# EAGLE board cs_v1 (EAGLE 9.5.2), part 1 of 2
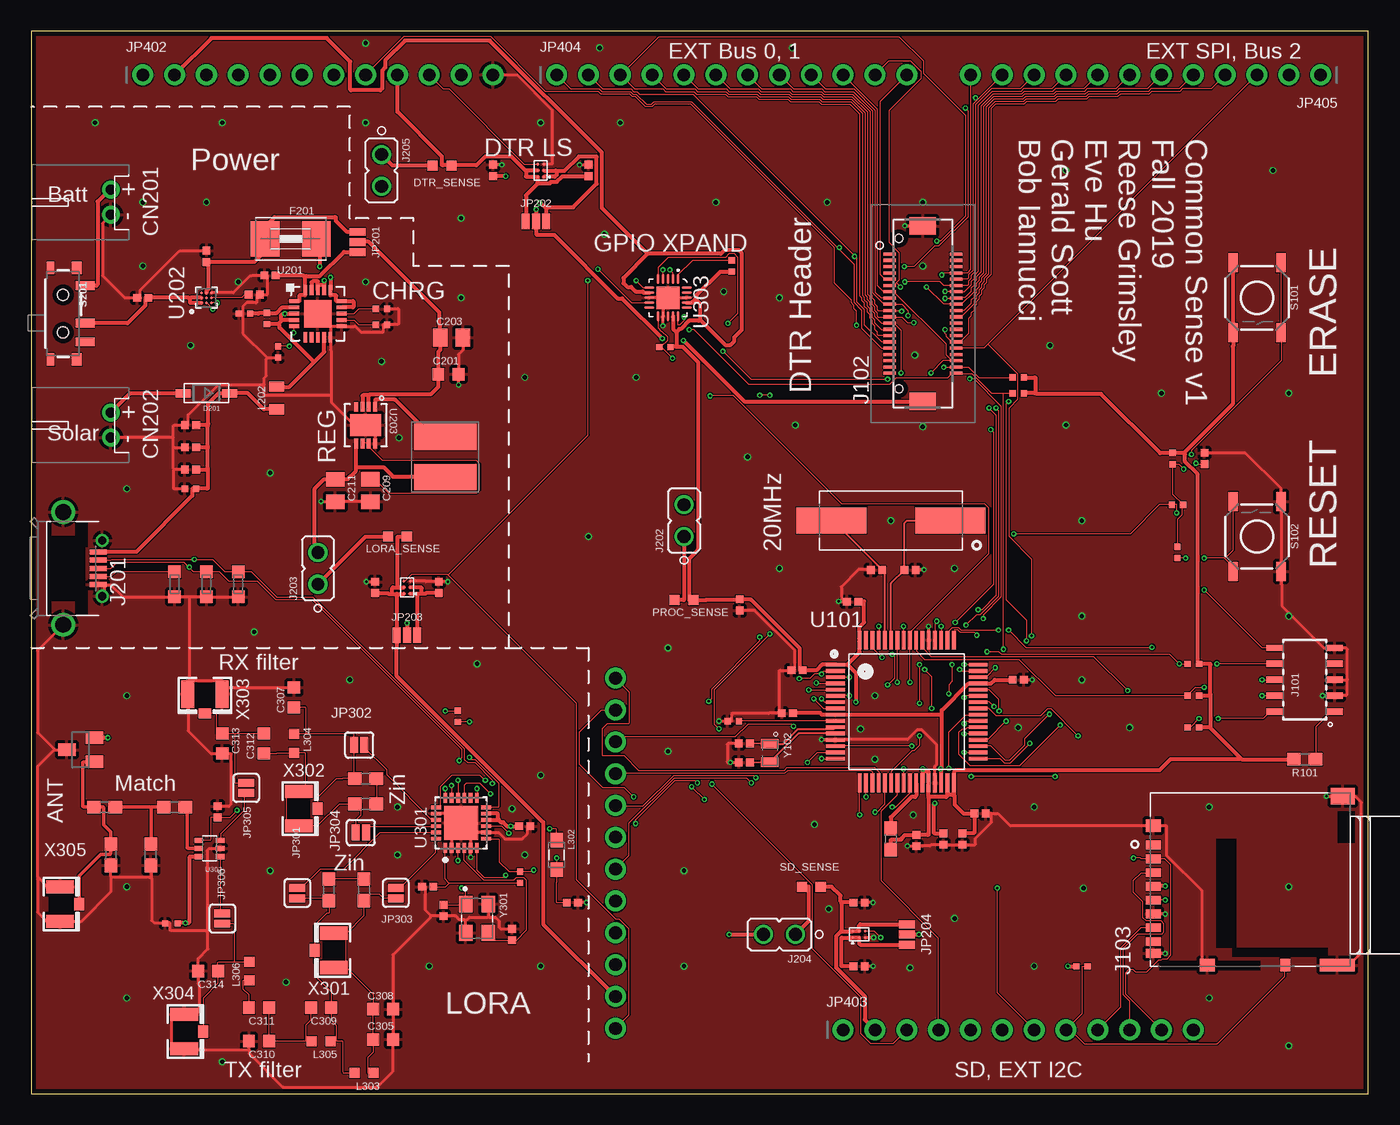
[diagram p0: board, top side]
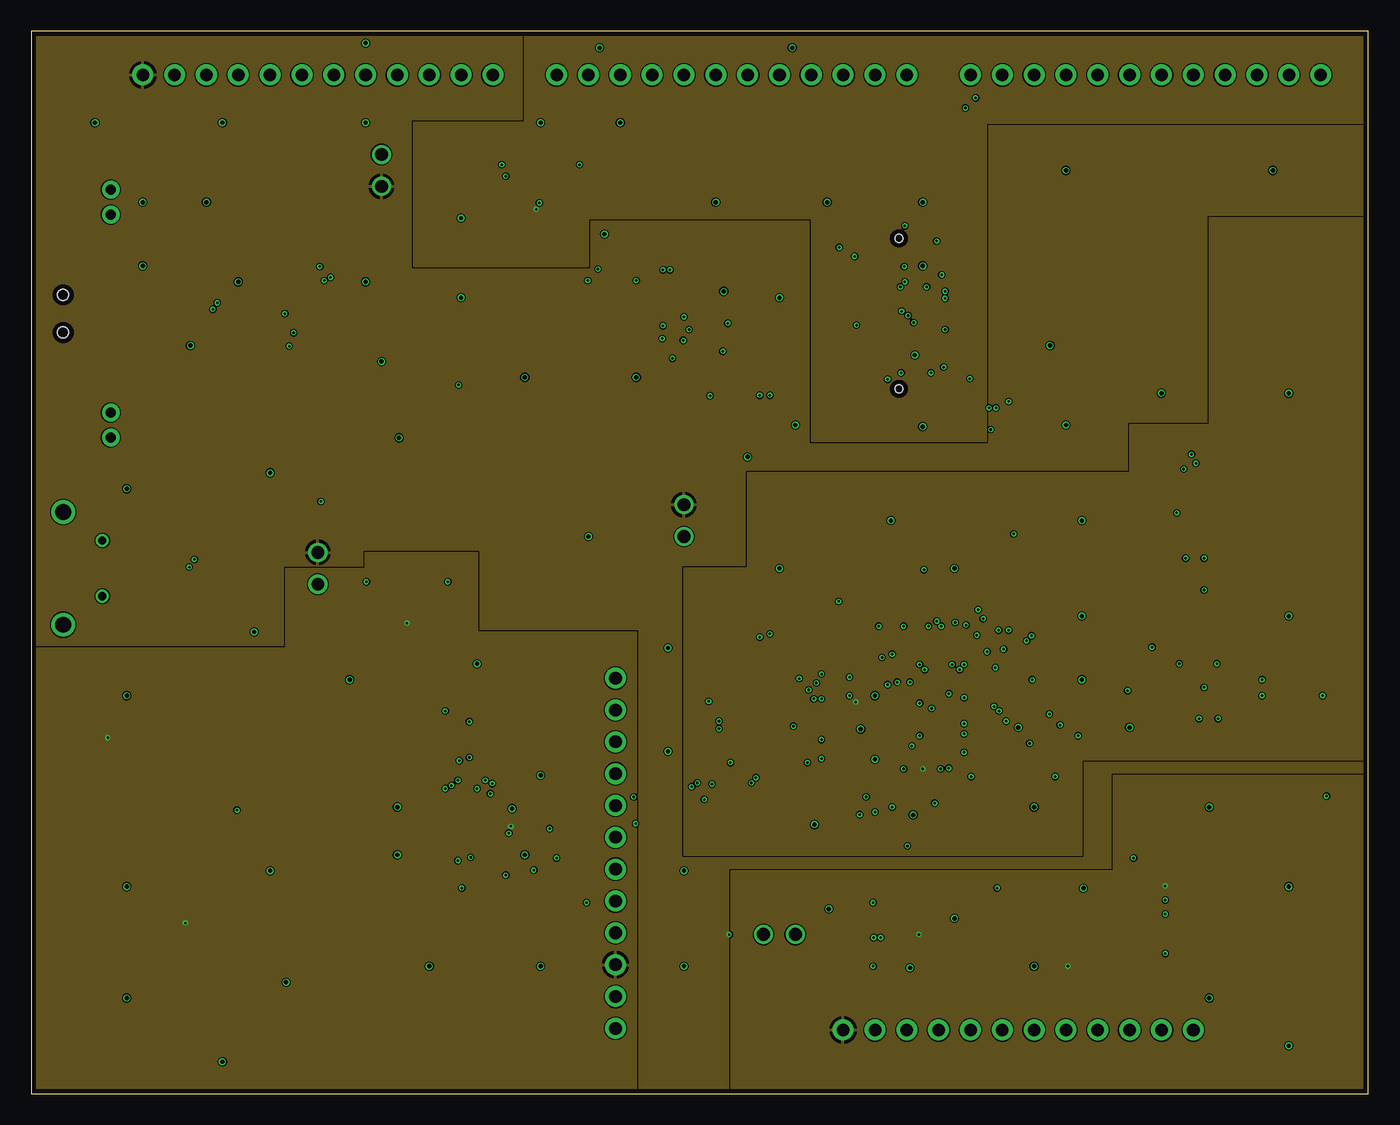
[diagram p1: board, inner layer Route2]
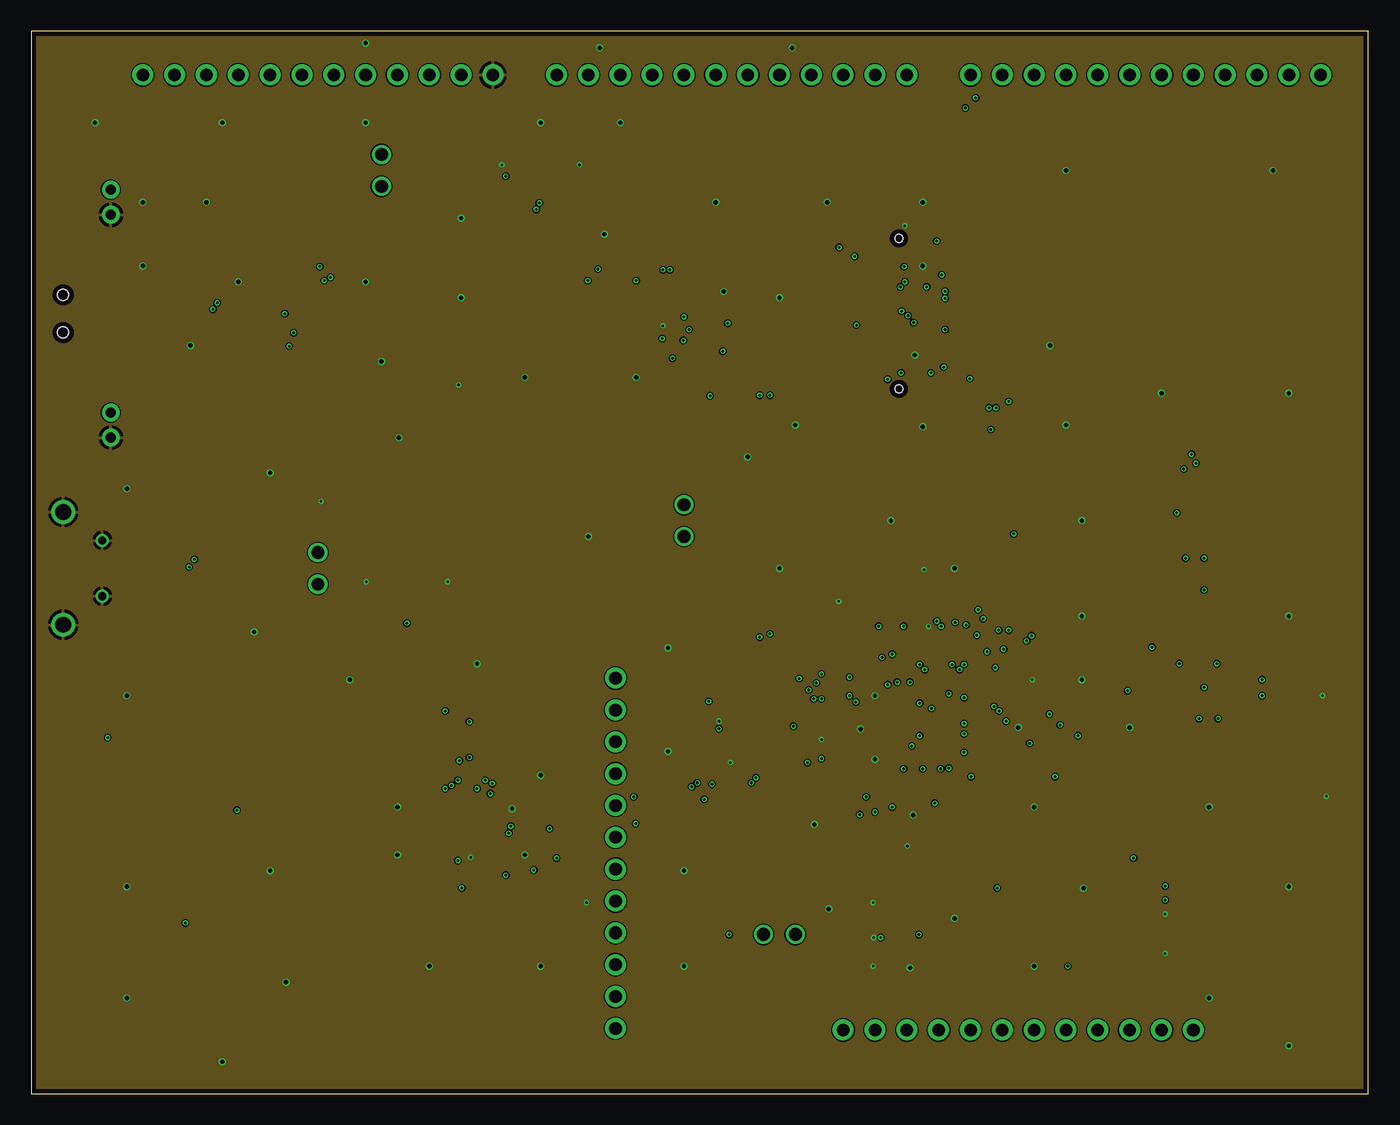
[diagram p2: board, inner layer Route15]
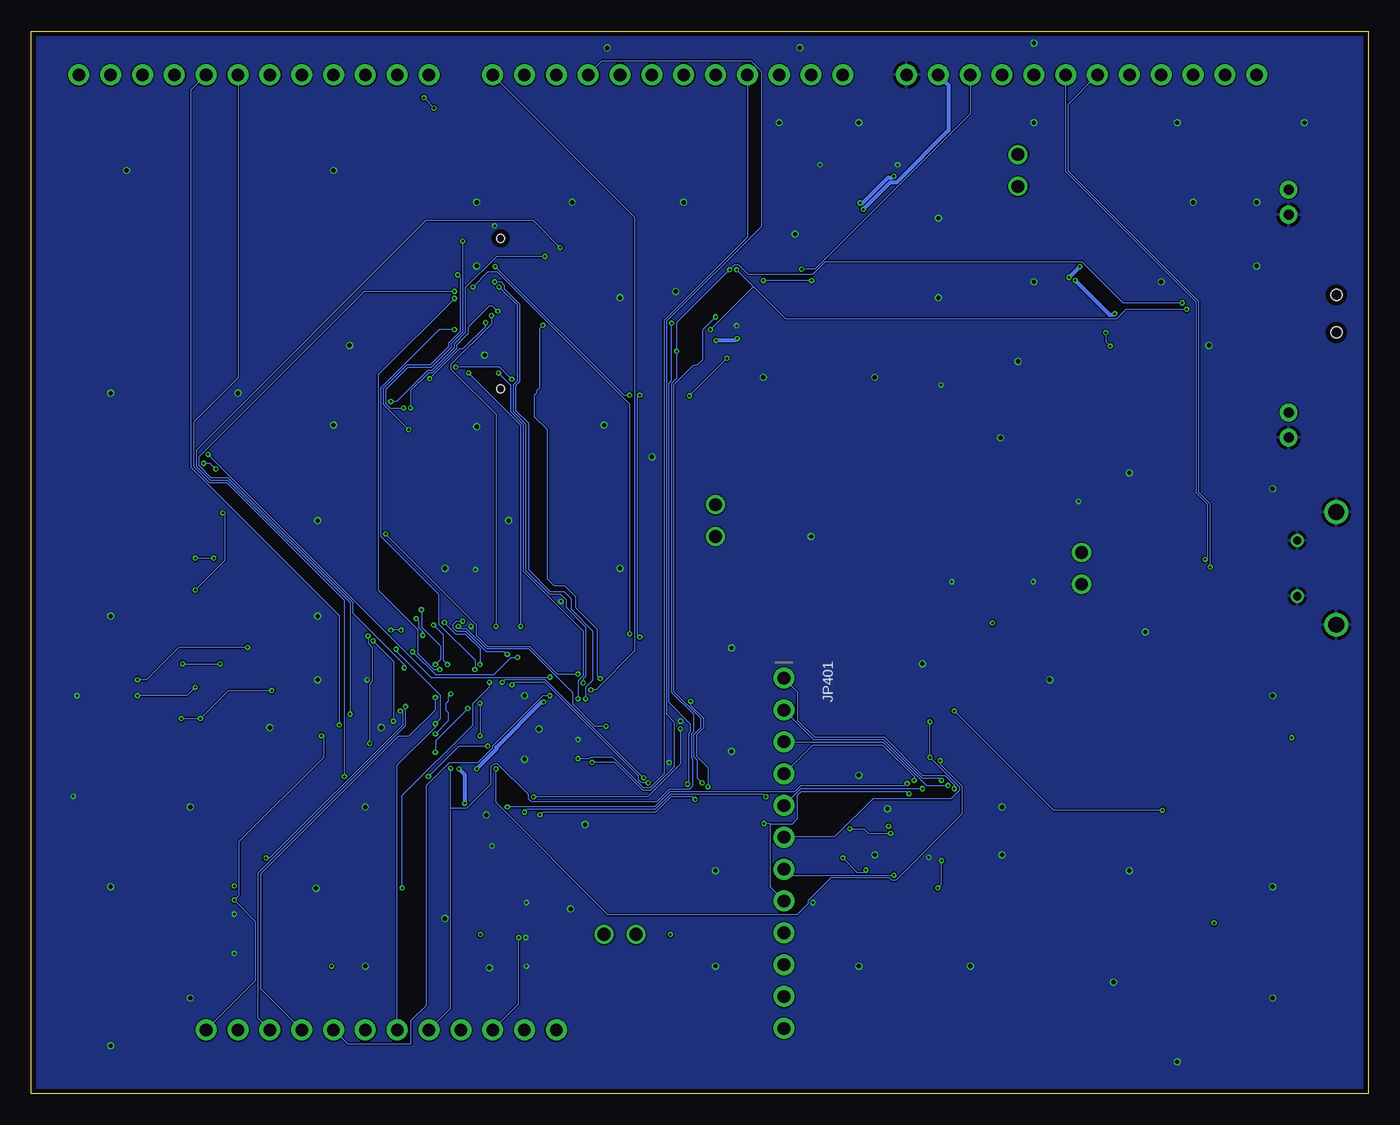
[diagram p3: board, bottom side, seen from below]

Size 106.66 x 84.76 mm. Coordinates in mm from the lower left corner, seen from the top.
Outline: 0,0 106.66,0 106.66,84.76 0,84.76 0,0
Copper layers (1*2*15*16): Top 0.035559375mm / dielectric 0.17018125mm / Route2 0.01778125mm / dielectric 47mil / Route15 0.01778125mm / dielectric 0.17018125mm / Bottom 0.035559375mm
Design rules "JLC": minimum track width 3.5mil, minimum drill 8mil, track to track 3.5mil, track to pad 3.5mil, pad to pad 3.5mil, via to via 5mil, smd to smd 3.5mil, copper to edge 15mil, drill to drill 6mil, minimum pad ring 4mil, minimum via ring 4mil, stop-mask expansion 2.5mil, vias tented up to drill 0mil, thermal gap 10mil
Net classes: 1 power_3v3: width 0.305 mm; 2 power_5: width 0.305 mm; 3 50_ohm: width 0.279 mm; 4 power_bat: width 0.305 mm; 5 10_mil: width 0.254 mm

## Footprints (pad centres in the part's own frame; a part is rotated, then mirrored left to right if it is on the bottom)
C0402 = smd 0.62 x 0.62: 1 -0.45,0; 2 0.45,0
C0603 = smd 0.95 x 1: 1 -0.8,0; 2 0.8,0
C0805 = smd 1.15 x 1.45: 1 -0.9,0; 2 0.9,0
C0402' = smd 0.5 x 0.5: 1 -0.5,0; 2 0.5,0
JST-PH-2-THM-RA = drill 0.8 pad 1.422: 1 1,0; 2 -1,0
SOD-123 = smd 1.2 x 0.7: A 1.85,0; C -1.85,0
1812 = smd 2.286 x 2.794: 1 -2.046,0; 2 2.046,0
SAMTECH_FTSH-105-01 = smd 0.508 x 1.27: 1 -2.54,-2.413; 2 -2.54,2.413; 3 -1.27,-2.413; 4 -1.27,2.413; 5 0,-2.413; 6 0,2.413; 7 1.27,-2.413; 8 1.27,2.413; 9 2.54,-2.413; 10 2.54,2.413
DF174040DS05V57_1 = smd 0.25 x 1: 1 -4.75,-2.65; 2 -4.75,2.65; 3 -4.25,-2.65; 4 -4.25,2.65; 5 -3.75,-2.65; 6 -3.75,2.65; 7 -3.25,-2.65; 8 -3.25,2.65; 9 -2.75,-2.65; 10 -2.75,2.65; 11 -2.25,-2.65; 12 -2.25,2.65; 13 -1.75,-2.65; 14 -1.75,2.65; 15 -1.25,-2.65; 16 -1.25,2.65; 17 -0.75,-2.65; 18 -0.75,2.65; 19 -0.25,-2.65; 20 -0.25,2.65; 21 0.25,-2.65; 22 0.25,2.65; 23 0.75,-2.65; 24 0.75,2.65; 25 1.25,-2.65; 26 1.25,2.65; 27 1.75,-2.65; 28 1.75,2.65; 29 2.25,-2.65; 30 2.25,2.65; 31 2.75,-2.65; 32 2.75,2.65; 33 3.25,-2.65; 34 3.25,2.65; 35 3.75,-2.65; 36 3.75,2.65; 37 4.25,-2.65; 38 4.25,2.65; 39 4.75,-2.65; 40 4.75,2.65 | smd 1.4 x 2.1: 41 -7,0; 42 7,0 | hole 0.65: -6,-1.9; 6,-1.9
HRS_DM3AT-SF-PEJM5 = smd 0.7 x 1.2: 1 3.2,0; 2 2.1,0; 3 1,0; 4 -0.1,0; 5 -1.2,0; 6 -2.3,0; 7 -3.4,0; 8 -4.5,0; SWB -5.45,0 | smd 1 x 1.2: P1 -6.4,-4.3; P4 4.75,0 | smd 1 x 2.8: P2 -6.4,-14.65 | smd 1.3 x 1.9: P3 7.1,-15.1 | smd 1 x 0.8: SWA -6.4,-10.5
ZX62D-AB-5P8 = smd 1.35 x 0.4: D+ 2.8,0; D- 2.8,0.65; GND 2.8,-1.3; USBID 2.8,-0.65; VBUS 2.8,1.3 | drill 1.25 pad 1.9: S1 0,-4.5; S2 0,4.5 | drill 0.65 pad 1.05: S3 3.125,2.225; S4 3.125,-2.225
HEADER-1X2 = drill 1.016: 1 0,-1.27; 2 0,1.27
SMT-JUMPER_3_NO_NO-SILK = smd 0.635 x 1.27: 1 -0.813,0; 2 0,0; 3 0.813,0
SMT-JUMPER_2_NO_SILK = smd 0.635 x 1.27: 1 -0.406,0; 2 0.406,0
1X12_ROUND = drill 1 pad 1.676: 1 -13.97,0; 2 -11.43,0; 3 -8.89,0; 4 -6.35,0; 5 -3.81,0; 6 -1.27,0; 7 1.27,0; 8 3.81,0; 9 6.35,0; 10 8.89,0; 11 11.43,0; 12 13.97,0
L-5X5SMD = smd 2.1 x 5: 1 -1.6,0; 2 1.6,0
0805 = smd 0.8 x 1.2: 1 -0.9,0; 2 0.9,0
L0402 = smd 0.5 x 0.5: 1 -0.45,0; 2 0.45,0
INDC2012X87N = smd 1.15 x 1: 1 -1.175,0; 2 1.175,0
L0603 = smd 0.8 x 0.8: 1 -0.75,0; 2 0.75,0
0603 = smd 1.1 x 1: 1 -0.85,0; 2 0.85,0
R0402 = smd 0.5 x 0.5: 1 -0.45,0; 2 0.45,0
CT/CN0603 = smd 1 x 1: 1 -1,0; 2 1,0
R0603 = smd 0.8 x 0.8: 1 -0.75,0; 2 0.75,0
TACTILE_SWITCH_SMD_5.2MM = smd 1.524 x 0.762: 1 -2.794,1.905; 2 2.794,1.905; 3 -2.794,-1.905; 4 2.794,-1.905
SWITCH_SPST_SMD_A = smd 0.7 x 1.5: 1 -2.25,-1.75; 2 -0.75,-1.75; 3 2.25,-1.75 | smd 1 x 0.6: GND1 -3.65,1; GND3 3.65,1 | smd 1 x 0.8: GND2 -3.65,-1.1; GND4 3.65,-1.1 | hole 0.9: -1.5,0; 1.5,0
QFP50P1200X1200X160-64N = smd 1.5 x 0.3: 1 -5.7,3.75; 2 -5.7,3.25; 3 -5.7,2.75; 4 -5.7,2.25; 5 -5.7,1.75; 6 -5.7,1.25; 7 -5.7,0.75; 8 -5.7,0.25; 9 -5.7,-0.25; 10 -5.7,-0.75; 11 -5.7,-1.25; 12 -5.7,-1.75; 13 -5.7,-2.25; 14 -5.7,-2.75; 15 -5.7,-3.25; 16 -5.7,-3.75; 33 5.7,-3.75; 34 5.7,-3.25; 35 5.7,-2.75; 36 5.7,-2.25; 37 5.7,-1.75; 38 5.7,-1.25; 39 5.7,-0.75; 40 5.7,-0.25; 41 5.7,0.25; 42 5.7,0.75; 43 5.7,1.25; 44 5.7,1.75; 45 5.7,2.25; 46 5.7,2.75; 47 5.7,3.25; 48 5.7,3.75 | smd 0.3 x 1.5: 17 -3.75,-5.7; 18 -3.25,-5.7; 19 -2.75,-5.7; 20 -2.25,-5.7; 21 -1.75,-5.7; 22 -1.25,-5.7; 23 -0.75,-5.7; 24 -0.25,-5.7; 25 0.25,-5.7; 26 0.75,-5.7; 27 1.25,-5.7; 28 1.75,-5.7; 29 2.25,-5.7; 30 2.75,-5.7; 31 3.25,-5.7; 32 3.75,-5.7; 49 3.75,5.7; 50 3.25,5.7; 51 2.75,5.7; 52 2.25,5.7; 53 1.75,5.7; 54 1.25,5.7; 55 0.75,5.7; 56 0.25,5.7; 57 -0.25,5.7; 58 -0.75,5.7; 59 -1.25,5.7; 60 -1.75,5.7; 61 -2.25,5.7; 62 -2.75,5.7; 63 -3.25,5.7; 64 -3.75,5.7
QFN20_4X4MC = smd 0.813 x 0.305: 1 -1.892,1; 2 -1.892,0.5; 3 -1.892,0; 4 -1.892,-0.5; 5 -1.892,-1; 11 1.892,-1; 12 1.892,-0.5; 13 1.892,0; 14 1.892,0.5; 15 1.892,1 | smd 0.305 x 0.813: 6 -1,-1.892; 7 -0.5,-1.892; 8 0,-1.892; 9 0.5,-1.892; 10 1,-1.892; 16 1,1.892; 17 0.5,1.892; 18 0,1.892; 19 -0.5,1.892; 20 -1,1.892 | smd 2.2 x 2.2: 21 0,0
BGA9N40P3X3_144X146X69N = smd 0.24 x 0.24: A1 -0.4,0.4; A2 0,0.4; A3 0.4,0.4; B1 -0.4,0; B2 0,0; B3 0.4,0; C1 -0.4,-0.4; C2 0,-0.4; C3 0.4,-0.4
DFN-8_DD = smd 0.787 x 0.305: 1 -1.46,0.75; 2 -1.46,0.25; 3 -1.46,-0.25; 4 -1.46,-0.75; 5 1.46,-0.75; 6 1.46,-0.25; 7 1.46,0.25; 8 1.46,0.75 | smd 1.753 x 2.489: 9 0,0
WLCSP6_2X3 = smd 0.254 x 0.254: A1 -0.25,0.5; A2 0.25,0.5; B1 -0.25,0; B2 0.25,0; C1 -0.25,-0.5; C2 0.25,-0.5
SEMTECH_SX1261IMLTRT_0 = smd 0.8 x 0.3: 1 -2,1.25; 2 -2,0.75; 3 -2,0.25; 4 -2,-0.25; 5 -2,-0.75; 6 -2,-1.25; 13 2,-1.25; 14 2,-0.75; 15 2,-0.25; 16 2,0.25; 17 2,0.75; 18 2,1.25 | smd 0.3 x 0.8: 7 -1.25,-2; 8 -0.75,-2; 9 -0.25,-2; 10 0.25,-2; 11 0.75,-2; 12 1.25,-2; 19 1.25,2; 20 0.75,2; 21 0.25,2; 22 -0.25,2; 23 -0.75,2; 24 -1.25,2 | smd 2.7 x 2.7: 25 0,0
SC-70 = smd 0.4 x 0.7: 1 -0.65,-0.85; 2 0,-0.85; 3 0.65,-0.85; 4 0.65,0.85; 5 0,0.85; 6 -0.65,0.85
UQFN20 = smd 0.8 x 0.2: 1 -1.5,0.8; 2 -1.5,0.4; 3 -1.5,0; 4 -1.5,-0.4; 5 -1.5,-0.8; 11 1.5,-0.8; 12 1.5,-0.4; 13 1.5,0; 14 1.5,0.4; 15 1.5,0.8 | smd 0.2 x 0.8: 6 -0.8,-1.5; 7 -0.4,-1.5; 8 0,-1.5; 9 0.4,-1.5; 10 0.8,-1.5; 16 0.8,1.5; 17 0.4,1.5; 18 0,1.5; 19 -0.4,1.5; 20 -0.8,1.5 | smd 1.8 x 1.8: 21 0,0
SOT23-3 = smd 1 x 1.4: 1 -0.95,-1.1; 2 0.95,-1.1; 3 0,1.1
U.FL = smd 2.2 x 1.05: 1 0,1.375; 2 0,-1.375 | smd 0.8 x 1: 3 1.525,0
XTAL_ABLS2-20.000MHZ-D4Y-T = smd 5.6 x 2.1: 1 -4.75,0; 2 4.75,0
XTAL_ABS06-32.768KHZ-T = smd 0.75 x 1.4: 1 -0.73,0; 2 0.73,0
ECS-32MHZ_CKM-TR_XTAL = smd 1.3 x 1.1: 1 -1.15,-0.9; 2 1.15,-0.9; 3 1.15,0.9; 4 -1.15,0.9

## Placement (x,y rotation side)
C101  5p  [C0402]  70.1,41.78 0 top
C102  16pF  [C0402]  56.9,27.94 180 top
C103  5p  [C0402]  67.44,41.78 180 top
C104  16pF  [C0402]  56.9,26.42 180 top
C105  4.7u  [C0402]  56.52,38.99 270 top
C106  2.2u  [C0402]  60.33,30.35 180 top
C107  100n  [C0402]  72.77,20.32 270 top
C108  100n  [C0402]  78.74,33.02 0 top
C109  100n  [C0402]  61.09,33.78 180 top
C110  100n  [C0402]  70.61,20.19 270 top
C111  100n  [C0402]  75.69,22.35 0 top
C112  100n  [C0402]  65.53,39.24 180 top
C113  100n  [C0402]  74.3,20.32 270 top
C114  100n  [C0402]  93.6,50.67 90 top
C201  0.1uF  [C0603]  33.27,57.4 0 top
C202  100n  [C0402]  8.89,63.5 180 top
C203  10uF  [C0805]  33.53,60.33 0 top
C204  10n  [C0402]  12.7,49.78 180 top
C205  10u  [C0402]  12.7,53.34 180 top
C206  470n  [C0402]  17.78,63.75 0 top
C207  10u  [C0402]  12.7,51.56 180 top
C208  4.7u  [C0402]  19.05,65.28 180 top
C209  2.2uF  [C0805]  27.05,48.13 270 top
C210  4.7u  [C0402]  13.97,66.8 90 top
C211  22uF  [C0805]  24.26,48.13 270 top
C212  1u  [C0402]  27.43,40.39 90 top
C213  1u  [C0402]  66.04,15.24 0 top
C214  1u  [C0402]  44.45,73.66 90 top
C215  100n  [C0402]  36.83,73.66 90 top
C216  100n  [C0402]  32.51,40.39 90 top
C217  100n  [C0402]  66.04,10.16 0 top
C301  17p  [C0402]  32.89,14.61 270 top
C302  17p  [C0402]  38.35,12.7 90 top
C303  10n  [C0402]  31.62,16.51 0 top
C304  100n  [C0402]  39.37,21.34 0 top
C305  47n  [C0603]  28.07,4.32 0 top
C306  470n  [C0402]  43.18,15.24 0 top
C307  1.8p  [C0603]  20.95,31.62 90 top
C308  47p  [C0603]  28.07,6.73 0 top
C309  3.3p  [C0603]  23.11,6.86 180 top
C310  8.2p  [C0603]  18.16,4.19 180 top
C311  39p  [C0603]  18.16,6.86 180 top
C312  2.4p  [C0603]  18.54,27.94 90 top
C313  1.0p  [C0603]  15.24,27.94 270 top
C314  3.0p  [C0603]  14.1,9.78 180 top
C315  1n  [C0402]  14.86,22.48 90 top
C316  1n  [C0402']  11.18,13.59 180 top
CN201  Battery  [JST-PH-2-THM-RA]  6.35,71.12 90 top
CN202  Solar  [JST-PH-2-THM-RA]  6.35,53.34 90 top
D201  MBR120VLSFT3GOSCT-ND  [SOD-123]  13.97,55.88 180 top
F201  MF-MSMF050-2  [1812]  20.7,68.2 180 top
J101  CORTEX_DEBUG_SMD  [SAMTECH_FTSH-105-01]  101.6,33.02 90 top
J102  HIROSE-DF17(4.0)-40DS-0.5V(57)  [DF174040DS05V57_1]  71.12,62.23 270 top
J103  DM3AT-SF-PEJM5  [HRS_DM3AT-SF-PEJM5]  89.53,16.64 90 top
J201  USBABSMTDIP  [ZX62D-AB-5P8]  2.54,41.91 0 top
J202  J-JUMPER  [HEADER-1X2]  52.07,45.72 0 top
J203  J-JUMPER  [HEADER-1X2]  22.86,41.91 0 top
J204  JMP_SD  [HEADER-1X2]  59.69,12.7 90 top
J205  J-JUMPER  [HEADER-1X2]  27.94,73.66 180 top
JP201  JMP_CHRG  [SMT-JUMPER_3_NO_NO-SILK]  26.04,67.94 270 top
JP202  JMP_DTR  [SMT-JUMPER_3_NO_NO-SILK]  40.26,69.6 0 top
JP203  JMP_LORA  [SMT-JUMPER_3_NO_NO-SILK]  29.97,36.58 0 top
JP204  JMP_SD  [SMT-JUMPER_3_NO_NO-SILK]  69.85,12.7 270 top
JP301  JUMPER-SMT_2_NO_SILK  [SMT-JUMPER_2_NO_SILK]  21.21,16 270 top
JP302  JUMPER-SMT_2_NO_SILK  [SMT-JUMPER_2_NO_SILK]  26.16,27.81 0 top
JP303  JUMPER-SMT_2_NO_SILK  [SMT-JUMPER_2_NO_SILK]  29.08,16 90 top
JP304  JUMPER-SMT_2_NO_SILK  [SMT-JUMPER_2_NO_SILK]  26.29,20.83 0 top
JP305  JUMPER-SMT_2_NO_SILK  [SMT-JUMPER_2_NO_SILK]  17.14,24.38 90 top
JP306  JUMPER-SMT_2_NO_SILK  [SMT-JUMPER_2_NO_SILK]  15.24,13.97 270 top
JP401  [1X12_ROUND]  46.61,19.18 270 bottom
JP402  [1X12_ROUND]  22.86,81.28 0 top
JP403  [1X12_ROUND]  78.74,5.08 0 top
JP404  [1X12_ROUND]  55.88,81.28 0 top
JP405  [1X12_ROUND]  88.9,81.28 180 top
L201  10uH  [L-5X5SMD]  33.02,50.8 270 top
L202  3.3µH/±20%/450mA  [0805]  19.56,55.5 90 top
L301  47n  [L0402]  38.99,17.27 270 top
L302  15u  [INDC2012X87N]  41.91,19.05 270 top
L303  47n  [L0603]  26.54,1.65 180 top
L304  15n  [L0603]  20.95,27.94 270 top
L305  2.2n  [L0603]  23.11,4.19 180 top
L306  9.1n  [L0603]  17.4,9.78 90 top
R101  0  [0603]  101.6,26.67 180 top
R102  100k  [R0402]  92.71,29.21 0 top
R103  100k  [R0402]  92.71,31.75 0 top
R104  100k  [R0402]  56.01,29.72 0 top
R105  100k  [R0402]  92.71,34.29 0 top
R106  0  [0603]  68.58,20.32 270 top
R107  4.7K  [R0402]  78.74,55.88 0 top
R108  4.7K  [R0402]  78.74,57.15 0 top
R109  510k  [R0402]  83.82,10.16 180 top
R110  39  [R0402]  91.44,43.18 90 top
R111  100k  [R0402]  91.06,50.67 90 top
R112  39  [R0402]  91.44,46.99 180 top
R201  270k  [R0402]  18.8,61.85 270 top
R202  100k  [R0402]  17.02,62.23 0 top
R203  2k  [R0402]  27.94,62.61 180 top
R204  100k  [R0402]  27.94,61.34 180 top
R205  CG0603MLC-05E  [CT/CN0603]  11.43,40.64 270 top
R206  10k  [R0402]  19.68,59.18 90 top
R207  CG0603MLC-05E  [CT/CN0603]  13.97,40.64 270 top
R208  CG0603MLC-05E  [CT/CN0603]  16.51,40.64 270 top
R209  10k  [R0402]  12.7,48.26 0 top
R210  1.33  [R0603]  29.21,44.45 0 top
R211  1  [R0603]  52.07,39.37 0 top
R212  1  [R0603]  62.23,16.51 0 top
R213  0.5  [R0603]  32.77,74.04 0 top
R301  0  [0603]  23.75,16.26 90 top
R302  0  [0603]  26.54,16.26 270 top
R303  0  [0603]  26.67,23.11 0 top
R304  0  [0603]  26.67,25.15 180 top
R305  10k  [R0402]  55.88,66.04 270 top
R306  1k  [R0402]  34.04,30.1 90 top
R307  0  [0603]  11.43,22.86 180 top
R308  0  [0603]  9.53,19.05 90 top
R309  0  [0603]  5.84,22.86 180 top
R310  0  [0603]  6.35,19.05 90 top
R311  10k  [R0402]  50.55,59.56 0 top
S101  MOMENTARY-SWITCH-SPST-SMD-5.2-REDUNDANT  [TACTILE_SWITCH_SMD_5.2MM]  97.79,63.5 270 top
S102  MOMENTARY-SWITCH-SPST-SMD-5.2-REDUNDANT  [TACTILE_SWITCH_SMD_5.2MM]  97.79,44.45 90 top
S201  [SWITCH_SPST_SMD_A]  2.54,62.23 90 top
U101  ATSAMG55J19A-AU  [QFP50P1200X1200X160-64N]  69.85,30.48 0 top
U201  U-MCP73871-2CCI/ML  [QFN20_4X4MC]  22.86,62.23 0 top
U202  COULOMB-MAX17262  [BGA9N40P3X3_144X146X69N]  13.97,63.5 90 top
U203  BUCK-LTC3624EDD-3.3PBF  [DFN-8_DD]  26.67,53.34 270 top
U204  LOADSWITCH-MIC94162  [WLCSP6_2X3]  40.64,73.66 180 top
U205  LOADSWITCH-MIC94162  [WLCSP6_2X3]  29.97,40.39 180 top
U206  LOADSWITCH-MIC94162  [WLCSP6_2X3]  66.04,12.7 90 top
U301  SEMTECH_SX1261IMLTRTSEMTECH_SX1261IMLTRT_0_0  [SEMTECH_SX1261IMLTRT_0]  34.29,21.59 90 top
U302  PE4259  [SC-70]  14.22,19.56 90 top
U303  EXPANDER-SX1502  [UQFN20]  50.8,63.5 270 top
U304  CM1213A-01SO  [SOT23-3]  3.94,27.43 90 top
X301  u.Fl  [U.FL]  24.13,11.43 180 top
X302  u.Fl  [U.FL]  21.34,22.73 0 top
X303  u.Fl  [U.FL]  13.84,31.88 270 top
X304  u.Fl  [U.FL]  12.19,4.95 0 top
X305  u.Fl  [U.FL]  2.29,15.11 0 top
Y101  ABLS2-20.000MHZ-D4Y-T  [XTAL_ABLS2-20.000MHZ-D4Y-T]  68.58,45.72 180 top
Y102  ABS06-32.768KHZ-T  [XTAL_ABS06-32.768KHZ-T]  58.93,27.18 270 top
Y301  ECS-32MHZ_CKM_XTAL  [ECS-32MHZ_CKM-TR_XTAL]  35.56,13.97 270 top

## Library data of the parts
C101 C103 = Capacitors; MANUFACTURER: Kemet; MP: CC0402BRNPO9BN5R0; MPN: C0402; TC: X7R; TOL: 10%; VOLTAGE: 6.3V
C102 C104 = Capacitors; MANUFACTURER: Kemet; MP: CBR04C160F5GAC; MPN: C0402; TC: X7R; TOL: 10%; VOLTAGE: 6.3V
C105 C208 C210 = Capacitors; MANUFACTURER: Kemet; MP: CC0402KRX5R5BB475; MPN: C0402; TC: X7R; TOL: 10%; VOLTAGE: 6.3V
C106 = Capacitors; MANUFACTURER: Kemet; MP: GRM155R60J225KE95D; MPN: C0402; TC: X7R; TOL: 10%; VOLTAGE: 6.3V
C107-C114 C202 C215-C217 = Capacitors; MANUFACTURER: Kemet; MP: CC0402KRX5R5BB104; MPN: C0402; TC: X7R; TOL: 10%; VOLTAGE: 6.3V
C201 = Capacitors; MANUFACTURER: Kemet; MP: C0603C104K3RACTU; MPN: C0603; TC: X7R; TOL: 10%; VOLTAGE: 6.3V
C203 = Capacitors; MANUFACTURER: Kemet; MP: C0805C106K9RACTU; MPN: C0805; TC: X7R; TOL: 10%; VOLTAGE: 6.3V
C204 = Capacitors; MANUFACTURER: Kemet; MP: CC0100KRX5R5BB103; MPN: C0402; TC: X7R; TOL: 10%; VOLTAGE: 6.3V
C205 C207 = Capacitors; MANUFACTURER: Kemet; MP: CC0402MRX5R4BB106; MPN: C0402; TC: X7R; TOL: 10%; VOLTAGE: 6.3V
C206 = Capacitors; MANUFACTURER: Kemet; MP: CC0402KRX5R5BB474; MPN: C0402; TC: X7R; TOL: 10%; VOLTAGE: 6.3V
C209 = Capacitors; MANUFACTURER: Kemet; MP: C0805C225K8RACTU; MPN: C0805; TC: X7R; TOL: 10%; VOLTAGE: 6.3V
C211 = Capacitors; MANUFACTURER: Kemet; MP: C0805C226K9PAC7800; MPN: C0805; TC: X7R; TOL: 10%; VOLTAGE: 6.3V
C212-C214 = Capacitors; MANUFACTURER: Kemet; MP: CC0402KRX5R5BB105; MPN: C0402; TC: X7R; TOL: 10%; VOLTAGE: 6.3V
C301 C302 = Capacitors; MANUFACTURER: Kemet; MP: GCQ1555C1H170JB01D; MPN: C0402; TC: X7R; TOL: 5%; VOLTAGE: 6.3V
C303 = Capacitors; MANUFACTURER: Kemet; MP: GRM155R71E103KA01D; MPN: C0402; TC: X7R; TOL: 10%; VOLTAGE: 6.3V
C304 = Capacitors; MANUFACTURER: Kemet; MP: GRM155R71C104KA88D; MPN: C0402; TC: X7R; TOL: 10%; VOLTAGE: 6.3V
C305 = Capacitors; MANUFACTURER: Kemet; MP: CC0603KRX7R9BB473; MPN: C0603; TC: X7R; TOL: 10%; VOLTAGE: 6.3V
C306 = Capacitors; MANUFACTURER: Kemet; MP: GRM155R61A474KE15D; MPN: C0402; TC: X7R; TOL: 10%; VOLTAGE: 6.3V
C307 = Capacitors; MANUFACTURER: Kemet; MP: CC0603BRNPO9BN1R8; MPN: C0603; TC: X7R; TOL: 10%; VOLTAGE: 6.3V
C308 = Capacitors; MANUFACTURER: Kemet; MP: CC0603FRNPO0BN470; MPN: C0603; TC: X7R; TOL: 10%; VOLTAGE: 6.3V
C309 = Capacitors; MANUFACTURER: Kemet; MP: AC0603CRNPO9BN3R3; MPN: C0603; TC: X7R; TOL: 10%; VOLTAGE: 6.3V
C310 = Capacitors; MANUFACTURER: Kemet; MP: CC0603BRNPO9BN8R2; MPN: C0603; TC: X7R; TOL: 10%; VOLTAGE: 6.3V
C311 = Capacitors; MANUFACTURER: Kemet; MP: CC0603FRNPO9BN390; MPN: C0603; TC: X7R; TOL: 10%; VOLTAGE: 6.3V
C312 = Capacitors; MANUFACTURER: Kemet; MP: CC0603BRNPO9BN2R4; MPN: C0603; TC: X7R; TOL: 10%; VOLTAGE: 6.3V
C313 = Capacitors; MANUFACTURER: Kemet; MP: CC0603BRNPO9BN1R0; MPN: C0603; TC: X7R; TOL: 10%; VOLTAGE: 6.3V
C314 = Capacitors; MANUFACTURER: Kemet; MP: CC0603BRNPO9BN3R0; MPN: C0603; TC: X7R; TOL: 10%; VOLTAGE: 6.3V
C315 = Capacitors; MANUFACTURER: Kemet; MP: CC0402JRX7R9BB102; MPN: C0402; TC: X7R; TOL: 10%; VOLTAGE: 6.3V
C316 = common_sense; MP: CC0402JRX7R9BB102; TC: X5R; TOL: 5%; VOLT: 6.3V
CN201 CN202 = adafruit; MP: S2B-PH-K-S(LF)(SN)
D201 = adafruit; MP: MBR120VLSFT3G
F201 = adafruit; MP: MF-MSMF050-2
J101 = Debuggers; DIGIKEY-NUM: SAM13160TR-ND; MP: FTSH-105-01-F-DV-K-TR; PARTNO: FTSH-105-01-F-DV-K-TR
J102 = Connectors; DESCRIPTION: Hirose DF17 Series 0.5mm Pitch 40 Way 2 Row Straight PCB Socket, Surface Mount, Solder Termination; HEIGHT: mm; MANUFACTURER_NAME: Hirose; MANUFACTURER_PART_NUMBER: DF17(4.0)-40DS-0.5V(57); MOUSER_PART_NUMBER: 798-DF174040DS05V57; MOUSER_PRICE-STOCK: https://www.mouser.com/Search/Refine.aspx?Keyword=798-DF174040DS05V57; MP: DF17(4.0)-40DS-0.5V(57)
J103 = DM3AT-SF-PEJM5; DESCRIPTION: DM3 RA SMT microSD memory card push/push; DIGI-KEY_PART_NUMBER: HR1964CT-ND; DIGI-KEY_PURCHASE_URL: https://www.digikey.com/product-detail/en/hirose-electric-co-ltd/DM3AT-SF-PEJM5/HR1964CT-ND/2533566?utm_source=snapeda&utm_medium=aggregator&utm_campaign=symbol; MF: Hirose; MP: DM3AT-SF-PEJM5; PACKAGE: None
J201 = ZX62D-AB-5P8; MP: ZX62D-AB-5P8(30)
J202 = Connectors; DESCRIPTION: JMP_PROC; MP: TSW-110-14-L-S
J203 = Connectors; DESCRIPTION: JMP_LORA; MP: TSW-110-14-L-S
J204 = Connectors; DESCRIPTION: JMP_SD; MP: TSW-110-14-L-S
J205 = Connectors; DESCRIPTION: DTR_JMP; MP: TSW-110-14-L-S
JP201-JP204 = SparkFun-Jumpers
JP301-JP306 = Traffic-Sensor
JP401-JP405 = Connectors; MP: TSW-110-14-L-S
L201 = Iannucci; MP: VLCF5028T-100M1R0-2
L202 = SparkFun-Coils; MP: MLZ2012A3R3WT000; PARTNO: MLZ2012A3R3WT000; PROD_ID: NDUC-13076
L301 = Inductors; MP: LQW15AN47NJ00D
L302 = Inductors; DESCRIPTION: Fixed Ind 15uh 350ma 611 Mohm; DIGI-KEY_PART_NUMBER: 445-16377-1-ND; DIGI-KEY_PURCHASE_URL: https://www.digikey.com/product-detail/en/tdk-corporation/MLZ2012N150LTD25/445-16377-1-ND/4766832?utm_source=snapeda&utm_medium=aggregator&utm_campaign=symbol; MF: TDK; MP: MLZ2012N150LTD25; PACKAGE: 0805 TDK
L303 = Inductors; MP: MLF1608D47NMTA00
L304 = Inductors; MP: MLG1608B15NJT000
L305 = Inductors; MP: MLG1608B2N2ST000
L306 = Inductors; MP: LQW18AN9N1C00D
R101 R106 R301-R304 R307 R309 = SparkFun-Resistors; MP: RC0603JR-070RL; PROD_ID: RES-08609
R102-R105 R111 R202 R204 = Resistors; MANUFACTURER: Panasonic; MP: RC0402JR-07100KL; MPN: ERJ-; TOL: 5%
R107 R108 = Resistors; MANUFACTURER: Panasonic; MP: CRCW04024K70JNED; MPN: ERJ-; TOL: 5%
R109 = Resistors; MANUFACTURER: Panasonic; MP: RC0402JR-07510KL; MPN: ERJ-; TOL: 5%
R110 R112 = Resistors; MANUFACTURER: Panasonic; MP: RC0402FR-0739RL; MPN: ERJ-; TOL: 5%
R201 = Resistors; MANUFACTURER: Panasonic; MP: RC0402JR-07270KL; MPN: ERJ-; TOL: 5%
R203 = Resistors; MANUFACTURER: Panasonic; MP: RC0402JR-072KL; MPN: ERJ-; TOL: 5%
R205 R207 R208 = varistor; MP: CG0603MLC-05E
R206 R209 R305 R311 = Resistors; MANUFACTURER: Panasonic; MP: RC0402JR-0710KL; MPN: ERJ-; TOL: 5%
R210 = Resistors; MANUFACTURER: Panasonic; MP: CRCW06031R33FKEA; MPN: ERJ-; TOL: 5%
R211 R212 = Resistors; MANUFACTURER: Panasonic; MP: RCA06031R00FKEA; MPN: ERJ-; TOL: 5%
R213 = Resistors; MANUFACTURER: Panasonic; MP: RL0603FR-070R5L; MPN: ERJ-; TOL: 5%
R306 = Resistors; MANUFACTURER: Panasonic; MP: RC0402JR-071KL; MPN: ERJ-; TOL: 5%
R308 R310 = SparkFun-Resistors; DNP: T; PARTNO: *; PROD_ID: RES-08609
S101 S102 = SparkFun-Switches; MP: COM-08720; PROD_ID: SWCH-08247; SF_SKU: COM-08720
S201 = SparkFun-Switches; MP: COM-10860; PROD_ID: SWCH-10651; SF_SKU: COM-10860
U101 = Processors; DESCRIPTION: SAMG55 is still under 1st revision _Rev.A_, only see its orderable Sept 15th; DIGI-KEY_PART_NUMBER: ATSAMG55J19A-AU-ND; DIGI-KEY_PURCHASE_URL: https://www.digikey.com/product-detail/en/microchip-technology/ATSAMG55J19A-AU/ATSAMG55J19A-AU-ND/5325413?utm_source=snapeda&utm_medium=aggregator&utm_campaign=symbol; MF: Microchip; MP: ATSAMG55J19A-AU; PACKAGE: LQFP-64 Microchip
U201 = BatteryCharger; COPYRIGHT: Copyright C 2015 Accelerated Designs. All rights reserved; MANUFACTURER_PART_NUMBER: MCP738712CCIML; MP: MCP738712CCIML; VENDOR: Microchip
U202 = CoulombCounters; MANUFACTURER: Maxim Integrated; MP: MAX17262REWL+T; MPN: MAX17262REWL+T
U203 = Regulators; MANUFACTURER: Linear Technology Corporation; MP: LTC3624EDD3.3#PBF; MPN: LTC3624EDD3.3#PBF
U204-U206 = Switches; MANUFACTURER: Microchip Technology; MP: MIC94162YCS-TR; MPN: MIC94162YCS-TR; PARTNO: MIC94162; QUENCH: YES; SOFTSTART: NO
U301 = Radios; CENTROID_NOT_SPECIFIED: No; DATASHEET: https://www.semtech.com/uploads/documents/DS_SX1261-2_V1.1.pdf; DEVICE_CLASS_L1: Integrated Circuits (ICs); DEVICE_CLASS_L2: RF Semiconductors and Devices; DEVICE_CLASS_L3: Transceivers; DIGIKEY_DESCRIPTION: IC TXRX LORA SUB-GHZ 15DBM 24MLPQ; DIGIKEY_PART_NUMBER: SX1261IMLTRTCT-ND; HEIGHT: 1.08mm; INTERFACE: SPI; LEAD_FREE: yes; MAX_FREQUENCY: 960MHz; MAX_SUPPLY_VOLTAGE: 3.7V; MF: Semtech; MFG_PACKAGE_IDENT: QFN24; MFG_PACKAGE_IDENT_DATE: 0; MFG_PACKAGE_IDENT_REV: 0; MIN_SUPPLY_VOLTAGE: 1.8V; MOUSER_PART_NUMBER: 947-SX1261IMLTRT; MP: SX1261IMLTRT; MPN: SX1261IMLTRT; NUMBER_OF_GPIO: 3; PACKAGE: QFN24; PREFIX: U; ROHS: yes; STANDOFF_HEIGHT: 0mm; TEMPERATURE_RANGE_HIGH: +85°C; TEMPERATURE_RANGE_LOW: -40°C; VERIFICATION_VERSION: 0.0.0.1
U302 = Iannucci; MP: 4259-63
U303 = Expanders; MP: SX1502I087TRT
U304 = ESD; MP: CM1213A-01SO
X301-X305 = adafruit; MP: 1909763-1
Y101 = common_sense; DESCRIPTION: ABLS2 Series 20.000 MHz ±30 ppm 18 pF -40 to +85 °C SMT Microprocessor Crystal; DIGI-KEY_PART_NUMBER: 535-9879-1-ND; DIGI-KEY_PURCHASE_URL: https://www.digikey.com/product-detail/en/abracon-llc/ABLS2-20.000MHZ-D4Y-T/535-9879-1-ND/2001502; MF: Abracon; MP: ABLS2-20.000MHZ-D4Y-T; PACKAGE: HC49/US Abracon
Y102 = Oscillators; DESCRIPTION: ABS06 Series 32.768 kHz ±10 ppm 12.5 pF -40 to +85 °C SMT Low Profile Crystal; DIGI-KEY_PART_NUMBER: 535-10247-1-ND; DIGI-KEY_PURCHASE_URL: https://www.digikey.com/product-detail/en/abracon-llc/ABS06-32.768KHZ-9-1-T/535-10247-1-ND/2218060; MF: Abracon; MP: ABS06-32.768KHZ-9-1-T; PACKAGE: SMD-2 Abracon
Y301 = Oscillators; DIGI-KEY_PART_NUMBER: XC1819CT-ND; DIGI-KEY_PURCHASE_URL: https://www.digikey.com/product-detail/en/ECS-320-20-33-CKM-TR/XC1819CT-ND/2781944?utm_campaign=buynow&WT.z_cid=ref_octopart_dkc_buynow&utm_medium=aggregator&curr=usd&site=us&utm_source=octopart; MP: ECS-320-20-33-CKM-TR; PARTNO: ECS-320-20-33-CKM-TR

## Nets
3V3 [power_3v3]: C211.1 J202.2 J203.2 J204.2 J205.2 JP402.1 L201.2 U203.5
3V3_DTR [power_3v3]: J102.42 JP202.2 JP402.11
3V3_DTR_LOAD [power_3v3]: C214.1 JP202.1 JP402.9 R213.2 U204.A2 U204.B2
3V3_DTR_SW_OUT [power_3v3]: C215.1 JP202.3 U204.A1 U204.B1
3V3_LORA [power_3v3]: C304.1 C316.1 JP203.2 JP401.10 U301.10 U301.11 U302.6 U304.2
3V3_LORA_LOAD [power_3v3]: C212.1 JP203.1 JP401.11 R210.2 U205.A2 U205.B2
3V3_LORA_SW_OUT [power_3v3]: C216.1 JP203.3 U205.A1 U205.B1
3V3_PROC [power_3v3]: C105.1 C109.1 C110.1 C111.1 C112.1 C113.1 JP402.2 R101.2 R102.2 R103.2 R105.2 R106.2 R107.2 R108.2 R111.2 R211.2 R305.2 R311.2 S101.3 S101.4 U101.1 U101.27 U101.28 U101.31 U101.32 U101.64 U303.7 U303.14 U303.17
3V3_SD [power_3v3]: J103.4 JP204.2 JP403.1 R109.2
3V3_SD_LOAD [power_3v3]: C213.1 JP204.1 JP403.2 R212.2 U206.A2 U206.B2
3V3_SD_SW_OUT [power_3v3]: C217.1 JP204.3 U206.A1 U206.B1
3V7_BATTERY [power_3v3]: C202.1 S201.2 U202.A1 U202.A2
3V7_BATTERY_LOAD [power_3v3]: C210.1 F201.2 JP201.1 U202.B3
4V2 [power_5]: C208.1 JP201.3 U201.1 U201.20
ADDR_I2C_CLK: J102.40 JP403.6 R107.1 U101.39 U202.B1 U303.4
ADDR_I2C_DAT: J102.38 JP403.5 R108.1 U101.40 U202.C1 U303.2
BAT_CHG_PROG1: R203.2 U201.13
BATT_ALERT: U202.B2
BATT_IN [power_3v3]: CN201.1 S201.3
BUSY_LORA: U301.14
CHG_VPCC [power_3v3]: R201.1 R202.2 U201.2
DAU_BRD_INT: JP403.4 U101.23
DEBUG_JTAGSEL: U101.63
DEBUG_TCK: J101.4 R103.1 U101.55
DEBUG_TDI: J101.8 R105.1 U101.62
DEBUG_TDO: J101.6 U101.50
DEBUG_TEST: R104.2 U101.10
DEBUG_TMS: J101.2 R102.1 U101.54
DTR_JMP [power_3v3]: J205.1 R213.1
EN_DTR: JP402.10 U204.C2 U303.9
EN_LORA: JP401.12 U205.C2 U303.6
EN_SD: JP403.3 U206.C2 U303.5
ERASE: S101.1 S101.2 U101.3
EXT_AD0: J102.32 JP405.3 U101.33
EXT_AD1: J102.30 JP405.4 U101.34
EXT_AD2: J102.31 JP404.1 U101.35
EXT_AD3: J102.29 JP404.2 U101.36
EXT_BUS0_GPIO_0/SPI_SCK: J102.27 JP404.3 U101.37
EXT_BUS0_GPIO_1: J102.25 JP404.4 U101.16
EXT_BUS0_INT: J102.23 JP404.5 U101.7
EXT_BUS0_RXD/SPI_MISO/TWCK/PDMIC_DAT: J102.21 JP404.6 U101.49
EXT_BUS0_TXD/SPI_MOSI/TWD/PDMIC_CLK: J102.19 JP404.7 U101.48
EXT_BUS1_GPIO_0/SPI_SCK: J102.17 JP404.8 U101.57
EXT_BUS1_GPIO_1: J102.15 JP404.9 U101.15
EXT_BUS1_INT: J102.13 J102.36 JP404.10 U101.61
EXT_BUS1_RXD/SPI_MISO/TWCK: J102.11 JP404.11 U101.4
EXT_BUS1_TXD/SPI_MOSI/TWD: J102.9 JP404.12 U101.5
EXT_BUS2_GPIO_0/SPI_SCK: J102.22 JP405.5 U101.38
EXT_BUS2_GPIO_1: J102.20 JP405.6 U101.14
EXT_BUS2_INT: J102.18 JP405.7 U101.18
EXT_BUS2_RXD/SPI_MISO/TWCK: J102.16 JP405.8 U101.47
EXT_BUS2_TXD/SPI_MOSI/TWD: J102.14 JP405.9 U101.46
EXT_SPI_MISO: J102.12 JP405.10 U101.8
EXT_SPI_MOSI: J102.10 JP405.11 U101.17
EXT_SPI_SCK: J102.8 JP405.12 U101.22
GND [10_mil]: C101.2 C102.2 C103.2 C104.2 C105.2 C106.2 C107.2 C108.2 C109.2 C110.2 C111.2 C112.2 C113.2 C114.2 C201.2 C202.2 C203.2 C204.2 C205.2 C206.2 C207.2 C208.2 C209.2 C210.2 C211.2 C212.2 C213.2 C214.2 C215.2 C216.2 C217.2 C301.2 C302.2 C303.1 C304.2 C305.2 C306.2 C307.2 C308.2 C310.2 C313.2 C314.2 C315.2 C316.2 CN201.2 CN202.2 J101.3 J101.5 J101.9 J102.41 J103.6 J103.P1 J103.P2 J103.P3 J103.P4 J103.SWB J201.GND J201.S1 J201.S2 J201.S3 J201.S4 JP402.12 R104.1 R202.1 R203.1 R204.1 R205.2 R206.1 R207.2 R208.2 R209.1 R308.1 R310.1 S102.3 S102.4 U101.13 U101.29 U101.53 U201.10 U201.11 U201.21 U202.C3 U203.8 U203.9 U204.C1 U205.C1 U206.C1 U301.2 U301.5 U301.8 U301.20 U301.25 U302.2 U303.8 U303.12 U303.18 U303.21 U304.3 X303.1 X303.2 X304.1 X304.2 X305.1 X305.2 Y301.2 Y301.4
LORA_DCC_SW: L302.1 U301.9
LORA_DIO1: JP401.5 U101.58 U301.13
LORA_DIO2: JP401.6 R306.1 U301.12
LORA_DIO3: JP401.7 U101.52 U301.6
LORA_JMP [power_3v3]: J203.1 R210.1
LORA_RESET: JP401.8 U301.15 U303.15
LORA_RF [50_ohm]: R309.2 R310.2 U304.1 X305.3
LORA_RF2_1 [50_ohm]: R307.2 R308.2 R309.1
LORA_RF_SW [50_ohm]: R307.1 U302.5
LORA_RFI_N: C312.1 JP304.1 L304.2 R303.1 X302.1 X302.2
LORA_RFI_RX_SW: C312.2 C313.1 JP305.2 X303.3
LORA_RFO_4: C309.1 JP301.2 L303.2 L305.1 R301.1 X301.3
LORA_RFO_RX_SW: C314.1 JP306.2 L306.2 X304.3
LORA_RXTX_1: C315.1 R306.2 U302.4
LORA_VREG: C306.1 L301.1 L302.2 U301.7
LORA_XIN: C301.1 U301.3 Y301.1
LORA_XOUT: C302.1 U301.4 Y301.3
N$1: JP301.1 U301.23
N$2 [power_3v3]: L201.1 U203.1
N$3: C309.2 C310.1 C311.1 L305.2
N$4: J101.1 R101.1
N$5: C311.2 L306.1
N$6: C307.1 JP302.1 L304.1 R304.2 X302.3
N$7: JP305.1 U302.3
N$8: C209.1 U203.6 U203.7
N$9: JP306.1 U302.1
N$10: R204.2 U201.12
N$12: JP304.2 U301.22
N$13: C206.1 U202.C2
N$14: JP303.2 U301.24
N$15: JP302.2 U301.21
N$16: R303.2 R304.1
N$17: R301.2 R302.1
N$19: U303.10
N$21: U303.16
N$22: U303.19
N$23: U303.20
OTGID: J201.USBID R205.1
PGOOD_3V3: U203.4
PROC_JMP [power_3v3]: J202.1 R211.1
PROC_RESET: J101.10 JP402.8 R112.2 U101.2
RESET_SW_1: C114.1 R110.2 R111.1 R112.1
RESET_SW_2: R110.1 S102.1 S102.2
RXTX_LORA: JP401.9
SD_DETECT: J103.SWA JP403.8 R109.1 U101.6
SD_JMP [power_3v3]: J204.1 R212.1
SOLAR_V [power_3v3]: CN202.1 D201.A
SPI_CS_LORA: JP401.4 U101.19 U301.19
SPI_CS_SD: J103.2 JP403.11 U101.44
SPI_MISO_LORA: JP401.3 U101.51 U301.17
SPI_MISO_SD: J103.7 JP403.9 U101.43
SPI_MOSI_LORA: JP401.2 U101.21 U301.16
SPI_MOSI_SD: J103.3 JP403.10 U101.42
SPI_SCK_LORA: JP401.1 U101.20 U301.18
SPI_SCK_SD: J103.5 JP403.12 U101.41
STAT1: U201.8
STAT2: U201.7
THERM: R206.2 U201.5
USB_D+: J201.D+ JP402.6 R207.1 U101.24
USB_D-: J201.D- JP402.7 R208.1 U101.25
USB_VBUS [power_3v3]: C204.1 C205.1 C207.1 D201.C J201.VBUS L202.1 R209.2
VBAT [power_3v3]: F201.1 U201.14 U201.15 U201.16
VDD_LORA: C303.2 L301.2 U301.1
VDDOUT [power_3v3]: C106.1 C107.1 C108.1 U101.9 U101.30 U101.45
VDDUSB [power_3v3]: R106.1 U101.26
VR_PA1: C305.1 C308.1 JP303.1 L303.1 R302.2 X301.1 X301.2
VREG_IN [power_5]: C201.1 C203.1 JP201.2 U203.2 U203.3
VSRC_RAW [power_3v3]: L202.2 R201.2 U201.3 U201.4 U201.9 U201.17 U201.18 U201.19
XIN: C101.1 U101.59 Y101.1
XIN32: C102.1 U101.11 Y102.1
XOUT: C103.1 U101.60 Y101.2
XOUT32: C104.1 U101.12 Y102.2
XPAND_RST: R305.1 U303.1
XPAND_WKUP: JP403.7 R311.1 U101.56 U303.11